# Altium PCB top_level.PcbDoc
Units mil, origin at the board's own origin, x right, y up, seen from the top; angles counter-clockwise.
Board outline 3400 x 1450 mil, 4 copper layers (Top Layer, Layer 1, Layer 2, Bottom Layer), stack 61.855 mil thick; 73 components, 69 nets, 309 pads, 97 vias.
Unrouted connection lines stored in the file: 1.
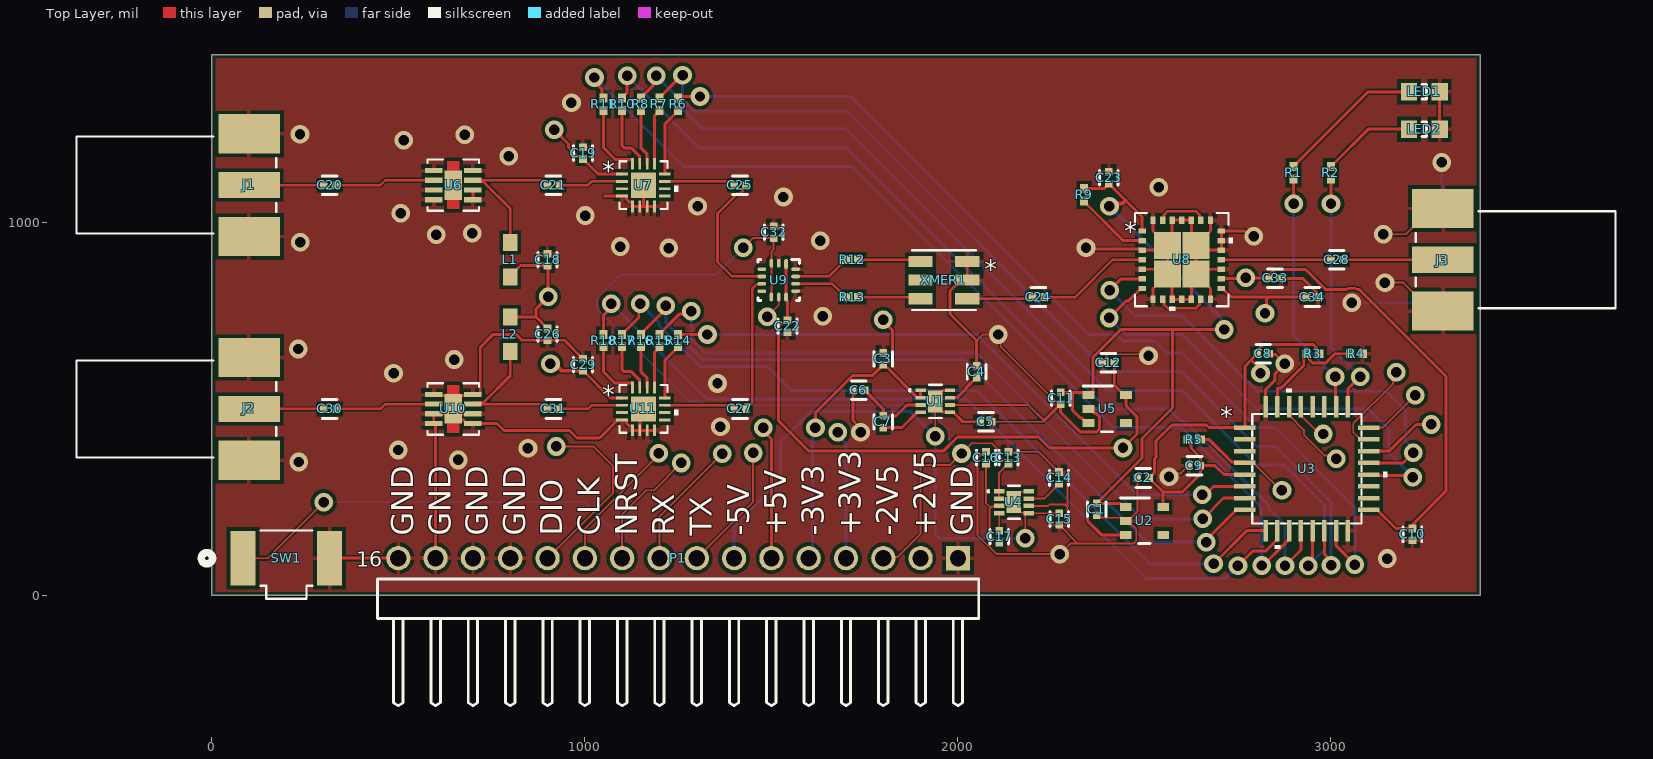
[diagram p0: Top Layer view]
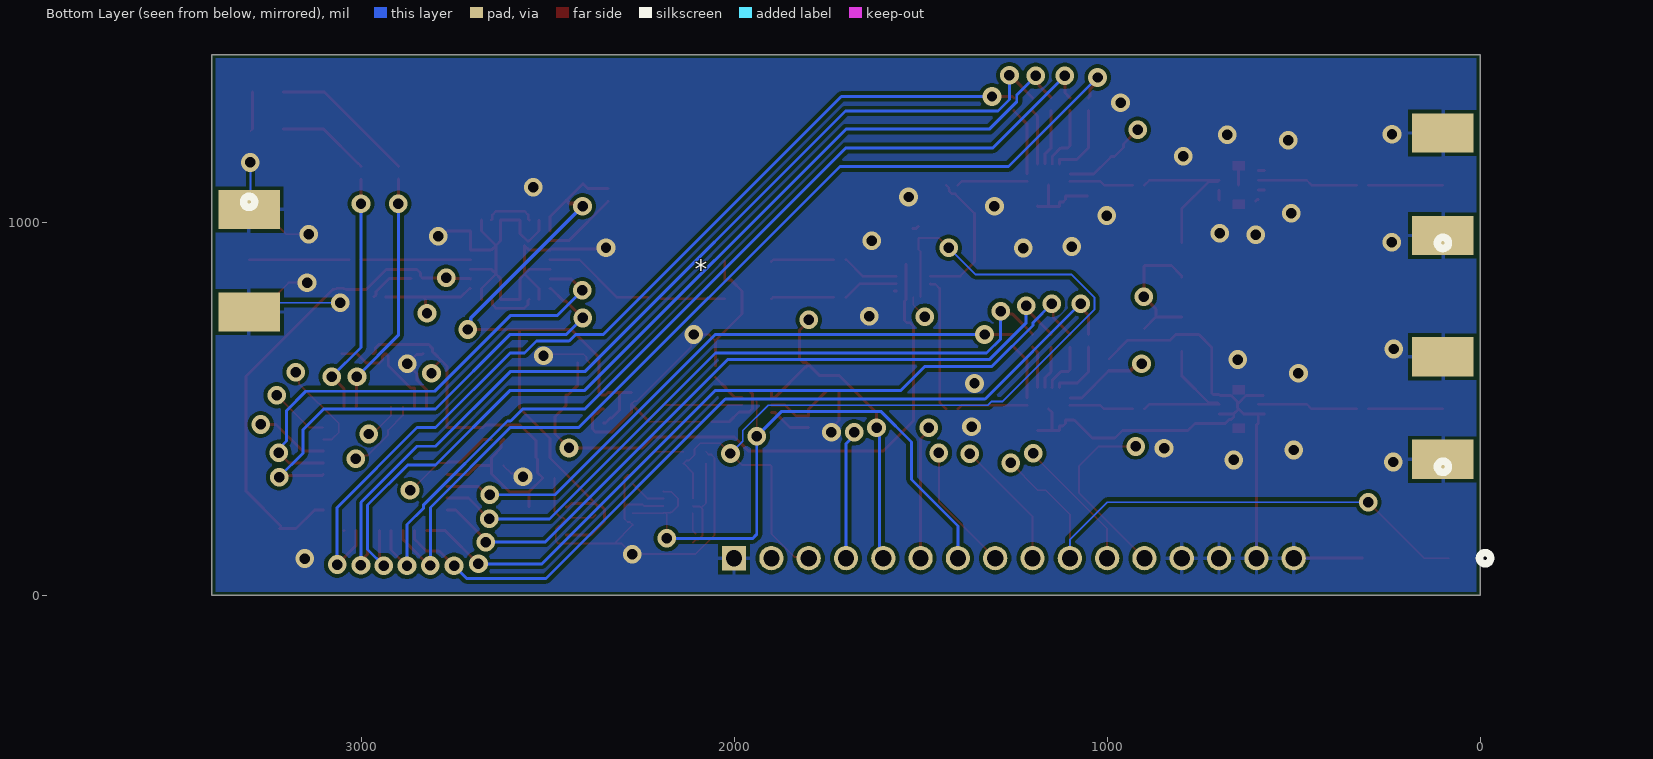
[diagram p1: Bottom Layer view, seen from below]
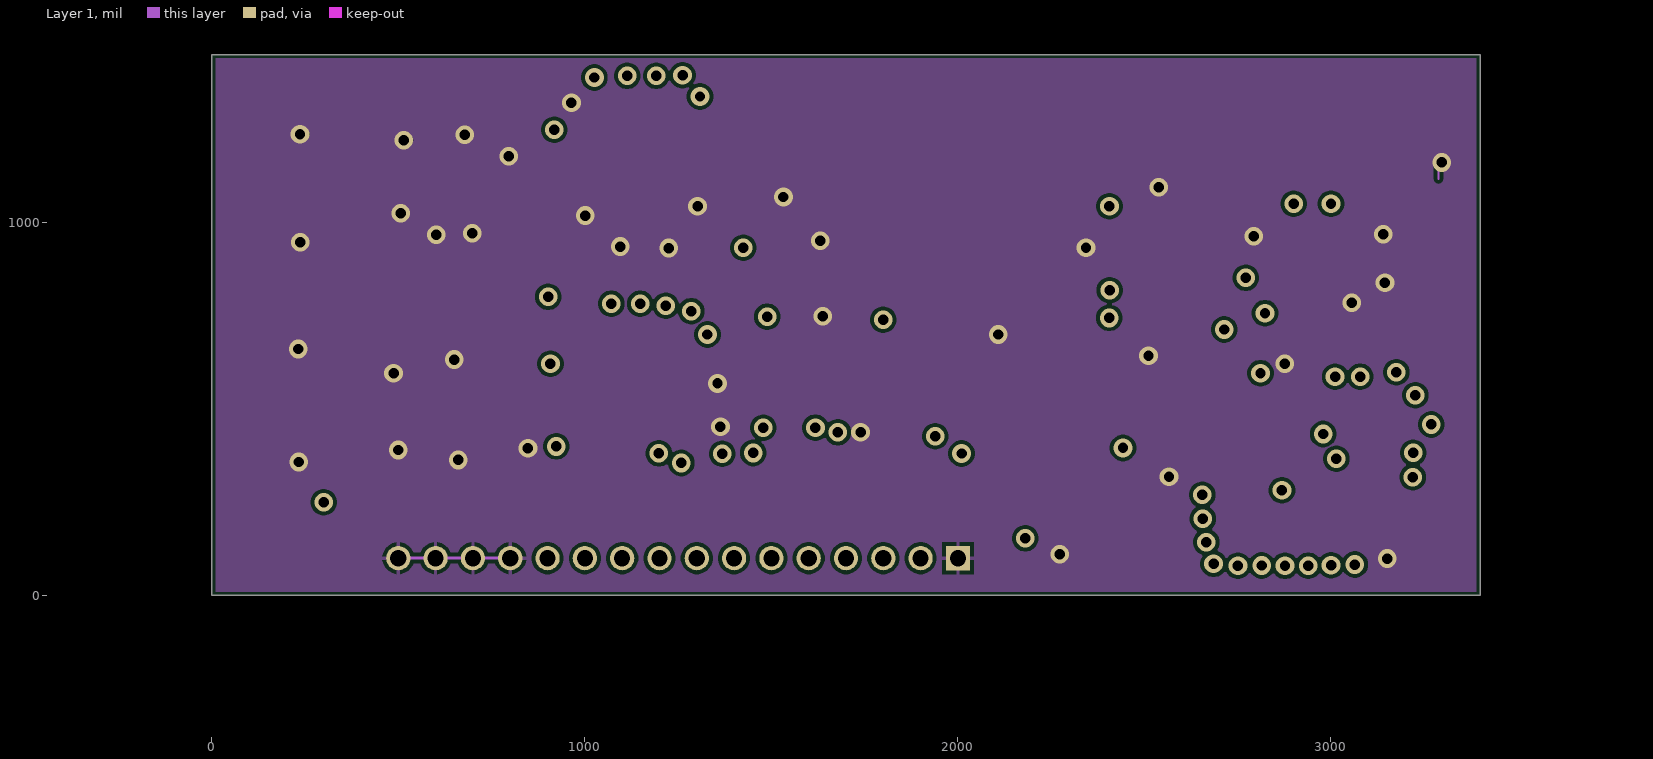
[diagram p2: Layer 1]
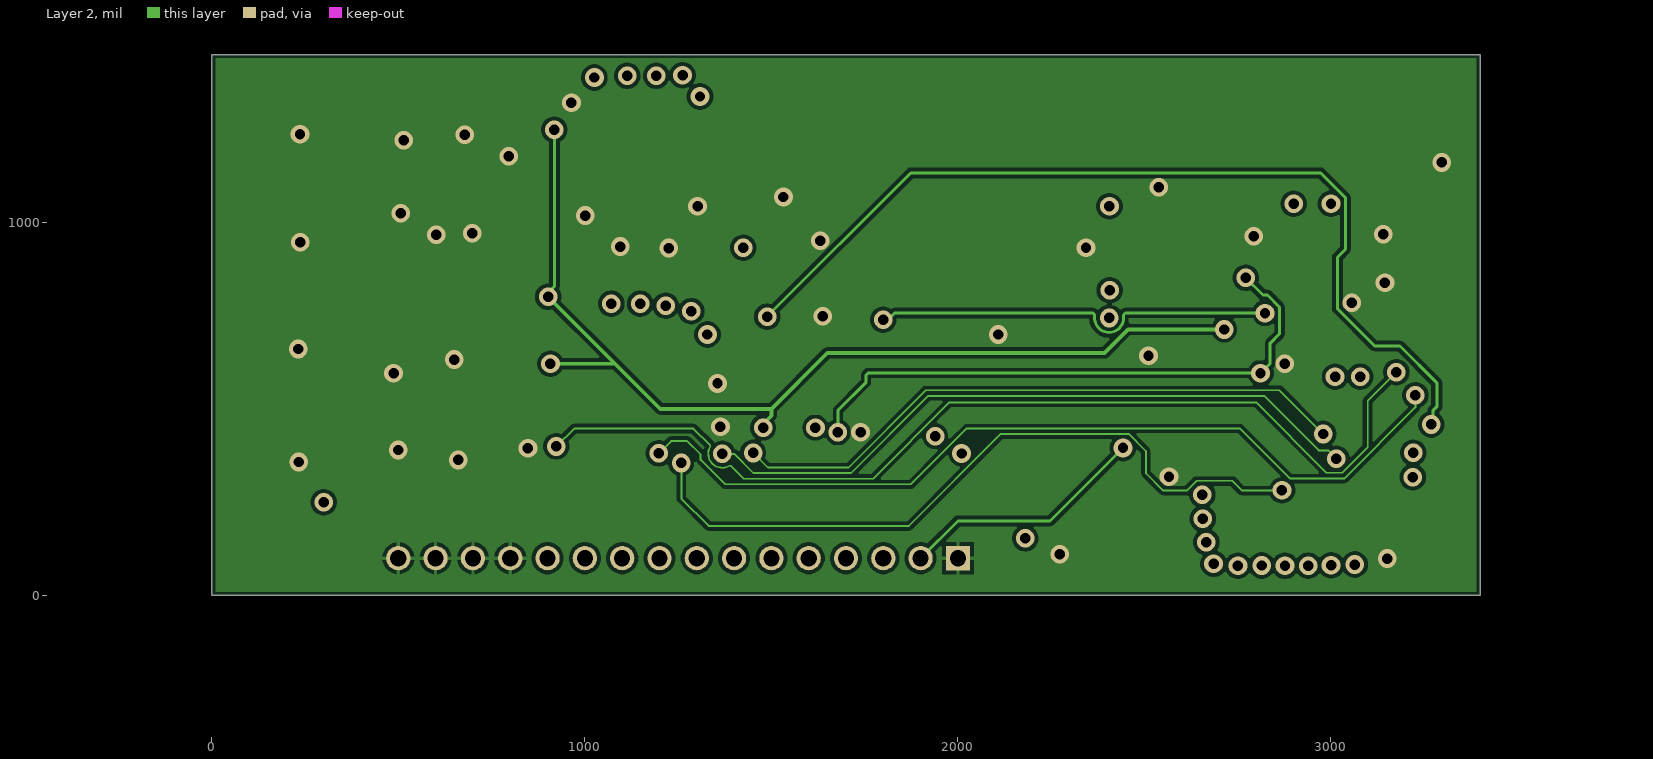
[diagram p3: Layer 2]
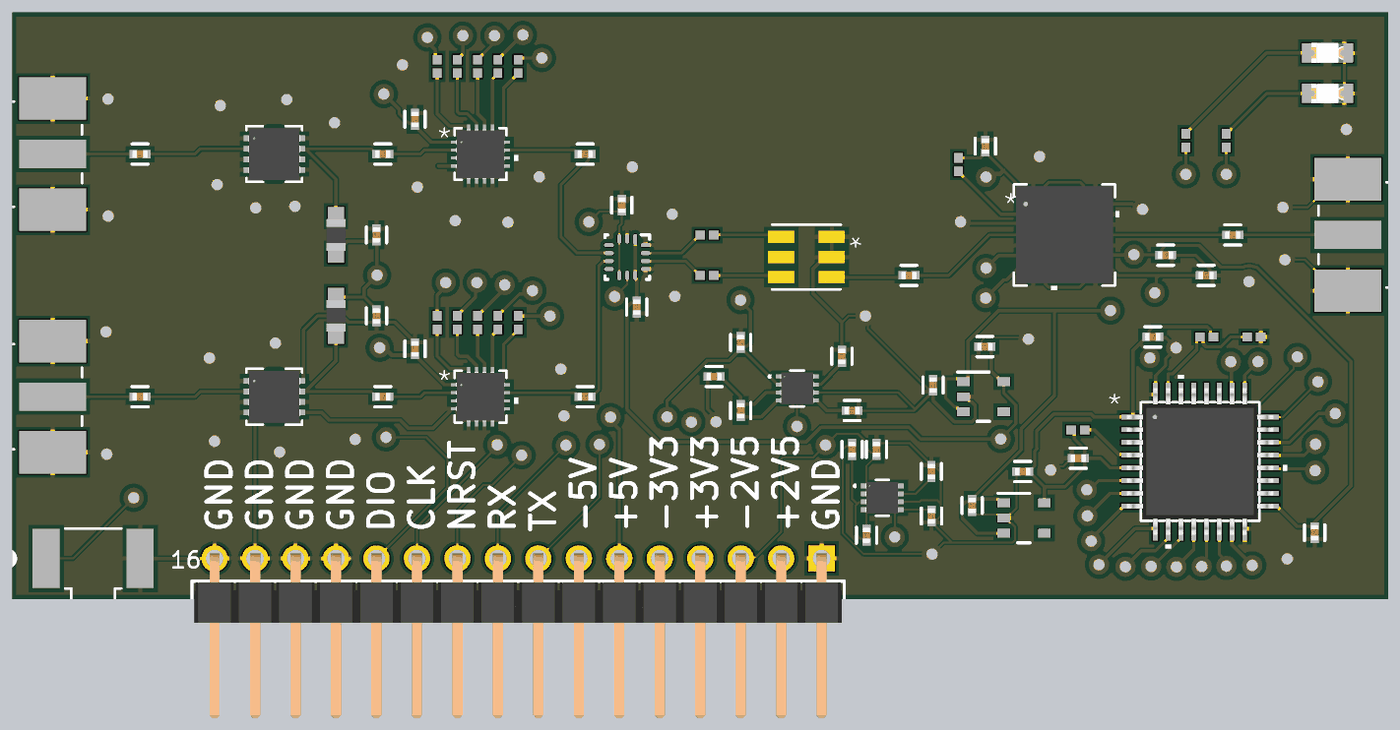
[diagram p4: 3D render of the assembled board from above, using the file's embedded part models]

## Layer stack, top to bottom
Top Solder: solder mask 0.4, Solder Resist, Dk 3.5
Top Layer: signal copper 1.4
Dielectric 2: prepreg 4, Core-011, Dk 4.4
Layer 1: signal copper 1.378
Dielectric 1: prepreg 48.2992, Core-011, Dk 4.4
Layer 2: signal copper 1.378
Dielectric 3: prepreg 4, Core-011, Dk 4.4
Bottom Layer: signal copper 1.4
Bottom Solder: solder mask 0.4, Solder Resist, Dk 3.5

## Board outline
0,0 3400,0 3400,1450 0,1450

## Design rules (kind name [scope] priority, off if disabled: settings)
BoardOutlineClearance [All] p1: gap=9.84 ignorepadtopadclearanceinfootprint=FALSE
Clearance Clearance_4 [InNamedPolygon('GND_poly_top')] p1: gap=10 ignorepadtopadclearanceinfootprint=FALSE except(0: Arc-Hole Track-Hole SMDPad-Hole THPad-Hole Via-Hole Fill-Hole Poly-Hole Region-Hole Text-Hole; 4: Arc-Fill Arc-Poly Arc-Region Track-Fill Track-Poly Track-Region)
Clearance Clearance_3 [InNet('NetC9_1')] p2 off: gap=15.75 ignorepadtopadclearanceinfootprint=TRUE
Clearance Clearance_2 [InNet('VIN')] p3 off: gap=31.5 ignorepadtopadclearanceinfootprint=TRUE
Clearance Clearance_1 [All] p4: gap=10 ignorepadtopadclearanceinfootprint=TRUE
Clearance [All] p5 off: gap=7.87 ignorepadtopadclearanceinfootprint=TRUE
ComponentClearance [All] p1 off: gap=10 collisioncheckmode=3 verticalgap=10 showdistances=FALSE
DiffPairsRouting [InDifferentialPair('DiffPair')] p1: maxlimit=10 minlimit=3.5 mostfreqgap=7.87 toplayer_minwidth=3.5 toplayer_maxwidth=15 toplayer_prefwidth=5.91 midlayer1_minwidth=3.5 midlayer1_maxwidth=15 midlayer1_prefwidth=5.91 midlayer2_minwidth=3.5 midlayer2_maxwidth=15 midlayer2_prefwidth=5.91 bottomlayer_minwidth=3.5 bottomlayer_maxwidth=15 bottomlayer_prefwidth=5.91 maxuncoupledlength=500
HoleSize [All] p1: absolutevalues=TRUE maxlimit=236.22 minlimit=1 maxpercent=80.000 minpercent=20.000
MatchedLengths usb [All] p1 off: tolerance=39.37 checknetsindiffpair=FALSE checkdiffpairvsdiffpair=TRUE checkxsignals=TRUE checkothers=TRUE
MinimumSolderMaskSliver [All] p1 off: minsoldermaskwidth=10
PlaneClearance [All] p1: clearance=10
PolygonConnect VIN [InNet('VIN')] p1: connectstyle=Direct reliefconductorwidth=10 reliefentries=4 polygonreliefangle="90 Angle" airgapwidth=10
PolygonConnect Connectors [HasFootprint('B06B-JWPF-SK-R')] p2: connectstyle=Direct reliefconductorwidth=10 reliefentries=4 polygonreliefangle="90 Angle" airgapwidth=10
PolygonConnect Connectors_1 [HasFootprint('B08B-JWPF-SK-R')] p3: connectstyle=Direct reliefconductorwidth=10 reliefentries=4 polygonreliefangle="90 Angle" airgapwidth=10
PolygonConnect Default [All] p4 off: connectstyle=Relief reliefconductorwidth=10 reliefentries=4 polygonreliefangle="90 Angle" airgapwidth=10
PolygonConnect vbus [InNet('NetQ1_1')] p5: connectstyle=Direct reliefconductorwidth=10 reliefentries=4 polygonreliefangle="90 Angle" airgapwidth=10
PolygonConnect vbus_1 [InNet('NetC9_1')] p6: connectstyle=Direct reliefconductorwidth=10 reliefentries=4 polygonreliefangle="90 Angle" airgapwidth=10
PolygonConnect VIAS [IsVia] p7: connectstyle=Direct reliefconductorwidth=0 reliefentries=4 polygonreliefangle="90 Angle" airgapwidth=0
PolygonConnect PolygonConnect_1 [All] p8: connectstyle=Relief reliefconductorwidth=10 reliefentries=4 polygonreliefangle="90 Angle" airgapwidth=10
RoomDefinition top_level [InComponentClass('top_level')] p1: confinementstyle=ConfineIn formatcopy=TRUE lockcomponents=FALSE outline -800,-350 3950,-350 3950,1600 -800,1600
RoutingVias [All] p1: holewidth=11.81 width=19.68 viastyle="Through Hole" minholewidth=9.84 minwidth=17.72 maxholewidth=248.03 maxwidth=50
SilkToSilkClearance [All] p1 off: silktosilkclearance=10
SilkToSolderMaskClearance [IsPad] p1 off: minsilkscreentomaskgap=10 clearancetoexposedcopper=TRUE
SolderMaskExpansion SolderMaskExpansion_1 [IsVia] p1: expansion=4 istentingtop=TRUE
SolderMaskExpansion [All] p2: expansion=4 istentingtop=FALSE
Width [All] p1: maxlimit=39.37 minlimit=5 preferedwidth=7.87
23 further rules are at their usual default settings.

## Components (designator, comment, footprint, x,y, rotation, side; value= is the part's Value field where it differs from the comment)
C1 "1uF" FP-C0402-BB-MFG 2371.79,231.06 r270 top value="0.10 μF"
C2 "1uF" FP-C0402-BB-MFG 2496.79,314.96 r180 top value="0.10 μF"
C3 "4.7uF" FP-C0402-BB-MFG 1800,634.25 r90 top value="0.10 μF"
C4 "1uF" FP-C0402-BB-MFG 2050,600 r90 top value="0.10 μF"
C5 "4.7uF" FP-C0402-BB-MFG 2075.24,465.75 r0 top value="0.10 μF"
C6 "1uF" FP-C0402-BB-MFG 1734.25,550 r180 top value="0.10 μF"
C7 "10nF" FP-C0402-BB-MFG 1800,465.75 r270 top value="0.10 μF"
C8 "10nF" FP-C0402-BB-MFG 2818.3,647.99 r0 top value="0.10 μF"
C9 "10nF" FP-C0402-BB-MFG 2634.05,347.99 r180 top value="0.10 μF"
C10 "10nF" FP-C0402-BB-MFG 3218.3,163.74 r270 top value="0.10 μF"
C11 "1uF" FP-C0402-BB-MFG 2275.4,528.73 r270 top value="0.10 μF"
C12 "1uF" FP-C0402-BB-MFG 2403.33,623.75 r180 top value="0.10 μF"
C13 "4.7uF" FP-C0402-BB-MFG 2135.49,369.7 r90 top value="0.10 μF"
C14 "1uF" FP-C0402-BB-MFG 2271.05,315.1 r90 top value="0.10 μF"
C15 "4.7uF" FP-C0402-BB-MFG 2271.33,205.01 r270 top value="0.10 μF"
C16 "1uF" FP-C0402-BB-MFG 2075.24,369.62 r90 top value="0.10 μF"
C17 "10nF" FP-C0402-BB-MFG 2110.96,157.4 r90 top value="0.10 μF"
C18 "C0402C104K8PACTU" FP-C0402-BB-MFG 900,900 r270 top value="0.10 μF"
C19 "C0402C104K8PACTU" FP-C0402-BB-MFG 995.15,1185.92 r90 top value="0.10 μF"
C20 "C0402C104K8PACTU" FP-C0402-BB-MFG 315.75,1100 r0 top value="0.10 μF"
C21 "C0402C104K8PACTU" FP-C0402-BB-MFG 915.75,1100 r0 top value="0.10 μF"
C22 "C0402C104K8PACTU" FP-C0402-BB-MFG 1543.08,721.7 r270 top value="0.10 μF"
C23 "C0402C104K8PACTU" FP-C0402-BB-MFG 2404.65,1119.65 r90 top value="0.10 μF"
C24 "C0402C104K8PACTU" FP-C0402-BB-MFG 2215.75,800 r0 top value="0.10 μF"
C25 "C0402C104K8PACTU" FP-C0402-BB-MFG 1415.75,1100 r0 top value="0.10 μF"
C26 "C0402C104K8PACTU" FP-C0402-BB-MFG 900,700 r90 top value="0.10 μF"
C27 "C0402C104K8PACTU" FP-C0402-BB-MFG 1415.75,500 r0 top value="0.10 μF"
C28 "C0402C104K8PACTU" FP-C0402-BB-MFG 3015.75,900 r0 top value="0.10 μF"
C29 "C0402C104K8PACTU" FP-C0402-BB-MFG 995.15,618.49 r90 top value="0.10 μF"
C30 "C0402C104K8PACTU" FP-C0402-BB-MFG 315.75,500 r0 top value="0.10 μF"
C31 "C0402C104K8PACTU" FP-C0402-BB-MFG 915.75,500 r0 top value="0.10 μF"
C32 "C0402C104K8PACTU" FP-C0402-BB-MFG 1506.14,973.71 r90 top value="0.10 μF"
C33 "C0402C104K8PACTU" FP-C0402-BB-MFG 2850,850 r180 top value="0.10 μF"
C34 "C0402C104K8PACTU" FP-C0402-BB-MFG 2950,800 r180 top value="0.10 μF"
J1 "142-0711-821" CONN_142-0711-821_CIN -95,1100 r90 top
J2 "142-0711-821" CONN_142-0711-821_CIN -95,500 r90 top
J3 "142-0711-821" CONN_142-0711-821_CIN 3495,900 r270 top
L1 "7447905" SMD-0805 800,900 r270 top
L2 "7447905" SMD-0805 800,700 r90 top
LED1 "150080SS75000" 0805_A 3250,1350 r180 top
LED2 "150080SS75000" 0805_A 3250,1250 r180 top
P1 "61301611021" 61301611021 1250,-9.06 r0 top
R1 "100" RESC1005X40X25NL05T10 2900,1133.27 r270 top
R2 "100" RESC1005X40X25NL05T10 3000,1133.27 r270 top
R3 "10k" RESC1005X40X25NL05T10 2951.57,647.99 r180 top
R4 "10k" RESC1005X40X25NL05T10 3068.3,647.99 r0 top
R5 "10k" RESC1005X40X25NL05T10 2633.41,417.58 r0 top
R6 "RC0402JR-070RL" RESC1005X40X25NL05T10 1250,1316.73 r90 top
R7 "RC0402JR-070RL" RESC1005X40X25NL05T10 1200,1316.73 r90 top
R8 "RC0402JR-070RL" RESC1005X40X25NL05T10 1150,1316.73 r90 top
R9 "560" RESC1005X40X25NL05T10 2338.15,1073.82 r270 top
R10 "RC0402JR-070RL" RESC1005X40X25NL05T10 1100,1316.73 r90 top
R11 "RC0402JR-070RL" RESC1005X40X25NL05T10 1050,1316.73 r90 top
R12 "40" RESC1005X40X25NL05T10 1716.73,900 r0 top
R13 "40" RESC1005X40X25NL05T10 1716.73,800 r0 top
R14 "RC0402JR-070RL" RESC1005X40X25NL05T10 1250,683.27 r90 top
R15 "RC0402JR-070RL" RESC1005X40X25NL05T10 1200,683.27 r90 top
R16 "RC0402JR-070RL" RESC1005X40X25NL05T10 1150,683.27 r90 top
R17 "RC0402JR-070RL" RESC1005X40X25NL05T10 1100,683.27 r90 top
R18 "RC0402JR-070RL" RESC1005X40X25NL05T10 1050,683.27 r90 top
SW1 "KSS221GLFS" SW_KSS221GLFS_CNK 200,100 r0 top
U1 "ADP7185ACPZN3.3-R7" CP_8_27_ADI 1939.46,520.47 r0 top
U2 "LP5907MFX-3.3/NOPB" DBV0005A_L 2500,200 r0 top
U3 "STM32L051K8T6" LQFP32_7X7X1P4 2935.15,339.7 r0 top
U4 "ADP7183ACPZN" CP-8-27_ADI 2150,250 r0 top
U5 "LP5907MFX-2.5/NOPB" DBV0005A_L 2400,500 r0 top
U6 "CMA-5043+" DL1721_MNC 647.5,1100 r0 top
U7 "HMC539ALP3E" HCP_16_1_ADI 1157.18,1100 r0 top
U8 "ADL8111ACCZN" IC28_ADL8111ACCZN_ADI 2600,900 r0 top
U9 "LMH3401IRMST" RMS0014A 1519.68,845.28 r270 top
U10 "CMA-5043+" DL1721_MNC 647.5,500 r0 top
U11 "HMC539ALP3E" HCP_16_1_ADI 1157.18,500 r0 top
XMER1 "TCM2-63WX+" DB1627_MNC 1962.5,845.28 r180 top

## Footprints (in the part's own frame and the unit in brackets; to place one, negate y for a bottom-side part, rotate by r counter-clockwise, add the part's x,y. Pads: shape width x height; smd on the part's side, far side on the other; paste and mask are expansions set on the pad)
0805_A [mm] "Chip LED, 2-Leads, Body 2.0x1.3mm, IPC Medium Density"
  rect 1.1x1.2 smd: 1(-1.05,0) 2(1.05,0)
  silkscreen extent -0.15,-0.5 0.15,0.5, body extent -1,-0.62 1,0.63, height 0.68
61301611021 [mm] "Pin Header, pitch 2.54 mm, THT, Angled, single row, 16p"
  rect 1.65x1.65 hole 1.1: 1(19.05,2.77)
  round 1.65 hole 1.1: 2(16.51,2.77) 3(13.97,2.77) 4(11.43,2.77) 5(8.89,2.77) 6(6.35,2.77) 7(3.81,2.77) 8(1.27,2.77) 9(-1.27,2.77) 10(-3.81,2.77) 11(-6.35,2.77) 12(-8.89,2.77) 13(-11.43,2.77) 14(-13.97,2.77) 15(-16.51,2.77) 16(-19.05,2.77)
  silkscreen extent -20.47,-7.27 20.47,1.35, body extent -20.32,-7.27 20.32,3.09, height 2.58
CONN_142-0711-821_CIN [mil]
  rect 70x165 smd paste+0 mask+0: 1(0,-195)
  rect 105x165 smd: 2(-137.5,-195) 2(137.5,-195)
  rect 105x165 smd far side: 2(-135,-195) 2(140,-195)
  silkscreen extent -130,-268 130,268, body extent 0,0 10,10, height 10
CP-8-27_ADI [mm]
  rect 0.705x0.3 smd paste+0 mask+0: 1(-1.002,0.75) 2(-1.002,0.25) 3(-1.002,-0.25) 4(-1.002,-0.75) 5(1.002,-0.75) 6(1.002,-0.25) 7(1.002,0.25) 8(1.002,0.75)
  rect 1x1.5 smd paste-0.737 mask+0: 9(0,0)
  silkscreen extent -1.78,-1.13 0.41,1.13, body extent -1.05,-1 1.05,1, height 0.58
CP_8_27_ADI [mm]
  rect 0.705x0.249 smd paste+0 mask+0: 1(-1.002,0.75) 2(-1.002,0.25) 3(-1.002,-0.25) 4(-1.002,-0.75) 5(1.002,-0.75) 6(1.002,-0.25) 7(1.002,0.25) 8(1.002,0.75)
  rect 1x1.5 smd paste+0 mask+0: 9(0,0)
  silkscreen extent -1.78,-1.13 0.43,1.13, body extent -1.05,-1 1.05,1, height 0.55
DB1627_MNC [mil]
  rect 65x30 smd paste-15 mask+0: 1(-62.5,-50) 2(-62.5,0) 3(-62.5,50) 4(62.5,50) 5(62.5,0) 6(62.5,-50)
  silkscreen extent -85,-80 85,80, body extent 0,0 10,10, height 10
DBV0005A_L [mm]
  rect 0.8x0.55 smd paste+0 mask+0.051: 1(-1.275,0.95) 2(-1.275,0) 3(-1.275,-0.95) 4(1.275,-0.95) 5(1.275,0.95)
  silkscreen extent -1.63,-1.55 0.38,1.55, body extent 0,0 0.25,0.25, height 0.25
DL1721_MNC [mil]
  rect 47x14 smd paste+0 mask+0: 1(-52.5,39) 2(-52.5,13) 3(-52.5,-13) 4(-52.5,-39) 5(52.5,-39) 6(52.5,-13) 7(52.5,13) 8(52.5,39)
  rect 47x79 smd paste+0 mask+0: 9(0,0)
  Top Layer region: 0,-39.5 16,-39.5 16,-64 0,-64
  Top Layer region: 0,-39.5 -16,-39.5 -16,-64 0,-64
  Top Layer region: 0,39.5 16,39.5 16,64 0,64
  Top Layer region: 0,39.5 -16,39.5 -16,64 0,64
  silkscreen extent -69,-69 69,69, body extent -64,-64 64,64, height 45
FP-C0402-BB-MFG [mm]
  rect 0.52x0.52 smd paste+0 mask+0: 1(-0.4,0) 2(0.4,0)
  silkscreen extent -0.5,-0.64 0.5,0.64, body extent -0.8,-0.4 0.8,0.4, height 0.25
HCP_16_1_ADI [mm]
  rect 0.805x0.189 smd paste+0 mask+0: 1(-1.452,0.75) 2(-1.452,0.25) 3(-1.452,-0.25) 4(-1.452,-0.75) 9(1.452,-0.75) 10(1.452,-0.25) 11(1.452,0.25) 12(1.452,0.75)
  rect 0.189x0.805 smd paste+0 mask+0: 5(-0.75,-1.452) 6(-0.25,-1.452) 7(0.25,-1.452) 8(0.75,-1.452) 13(0.75,1.452) 14(0.25,1.452) 15(-0.25,1.452) 16(-0.75,1.452)
  rect 1.725x1.725 smd paste+0 mask+0: 17(0,0)
  silkscreen extent -1.63,-1.63 2.36,1.63, body extent -1.55,-1.55 1.55,1.55, height 1
IC28_ADL8111ACCZN_ADI [mil]
  rect 20x14 smd paste+0 mask+0: 1(-106.14,76.77) 2(-106.14,51.18) 3(-106.14,25.59) 4(-106.14,0) 5(-106.14,-25.59) 6(-106.14,-51.18) 7(-106.14,-76.77) 15(106.14,-76.77) 16(106.14,-51.18) 17(106.14,-25.59) 18(106.14,0) 19(106.14,25.59) 20(106.14,51.18) 21(106.14,76.77)
  rect 14x20 smd paste+0 mask+0: 8(-76.77,-106.14) 9(-51.18,-106.14) 10(-25.59,-106.14) 11(0,-106.14) 12(25.59,-106.14) 13(51.18,-106.14) 14(76.77,-106.14) 22(76.77,106.14) 23(51.18,106.14) 24(25.59,106.14) 25(0,106.14) 26(-25.59,106.14) 27(-51.18,106.14) 28(-76.77,106.14)
  rect 72x72 smd paste+0 mask+0: 29(-38.39,-38.39) 30(-38.39,38.39) 31(38.39,-38.39) 32(38.39,38.39)
  silkscreen extent -125,-136 136,125, body extent -120,-120 120,120, height 56
LQFP32_7X7X1P4 [mil]
  rect 58x12 smd: 1(-166,110.24) 2(-166,78.74) 3(-166,47.24) 4(-166,15.75) 5(-166,-15.75) 6(-166,-47.24) 7(-166,-78.74) 8(-166,-110.24) 17(166,-110.24) 18(166,-78.74) 19(166,-47.24) 20(166,-15.75) 21(166,15.75) 22(166,47.24) 23(166,78.74) 24(166,110.24)
  rect 12x58 smd: 9(-110.24,-166) 10(-78.74,-166) 11(-47.24,-166) 12(-15.75,-166) 13(15.75,-166) 14(47.24,-166) 15(78.74,-166) 16(110.24,-166) 25(110.24,166) 26(78.74,166) 27(47.24,166) 28(15.75,166) 29(-15.75,166) 30(-47.24,166) 31(-78.74,166) 32(-110.24,166)
  silkscreen extent -146,-215 215,215, body extent -181,-181 181,181, height 63
RESC1005X40X25NL05T10 [mm] "Chip Resistor, 2-Leads, Body 1.00x0.50mm, IPC Medium Density"
  rect 0.6x0.55 smd: 1(-0.425,0) 2(0.425,0)
  body extent -0.53,-0.27 0.53,0.28, height 0.4
RMS0014A [mm]
  oval 0.7x0.25 smd paste+0 mask+0.051: 1(-1.1,0.5)
  oval 0.6x0.25 smd paste+0 mask+0.051: 2(-1.15,0) 3(-1.15,-0.5) 8(1.15,-0.5) 9(1.15,0) 10(1.15,0.5)
  oval 0.25x0.6 smd paste+0 mask+0.051: 4(-0.75,-1.15) 5(-0.25,-1.15) 6(0.25,-1.15) 7(0.75,-1.15) 11(0.75,1.15) 12(0.25,1.15) 13(-0.25,1.15) 14(-0.75,1.15)
  silkscreen extent -1.4,-1.4 1.4,1.4, body extent 0,0 0.25,0.25, height 0.25
SMD-0805 [mm] "Chip Inductor, 2-Leads, Body 2.0x1.2mm"
  rect 1.15x1 smd: 1(-1.175,0) 2(1.175,0)
  body extent -1,-0.6 1,0.6, height 0.89
SW_KSS221GLFS_CNK [mil]
  rect 67x146 smd paste+0 mask+0: 1(-116.14,0) 2(116.14,0)
  silkscreen extent -228,-109 70,74, body extent 0,0 10,10, height 10

## Part data
C1 C2 C3 C4 C5 C6 C7 C8 C9 C10 C11 C12 C13 C14 C15 C16 C17: library part CMP-2008-02046-2, "CAP CER 0.1UF 10V X5R 0402", Capacitance="0.10 μF", Manufacturer=Kemet, Manufacturer Part Number=C0402C104K8PACTU, Package=C0402-BB, Temperature="-55°C to +125°C", Temperature Characteristic=X5R, Temperature Coefficient=15%, Temperature Range High=+125°C, Temperature Range Low=-55°C, Tolerance=0.1, Voltage Rating="10 V", Automotive=No, Category=Cap, ComponentLink2Description=Datasheet, ComponentLink2URL=https://content.kemet.com/datasheets/KEM_C1002_X7R_SMD.pdf, Device Class L1="Passive Components", Device Class L2=Capacitors, Device Class L3="Ceramic Capacitors", Digikey Description="CAP CER 0.1UF 10V X5R 0402", Height=0.55mm, Ipc Land Pattern Name=CAPC10050X50, Lead Free=Yes, Material=Ceramic, Mouser Description="Capacitor 100 nF 10 VDC 0402", Octopart=https://octopart.com/c0402c104k8pactu-kemet-140039, RoHS=TRUE
C18 C19 C20 C21 C22 C23 C24 C25 C26 C27 C28 C29 C30 C31 C32 C33 C34: library part CMP-2008-02046-2, "CAP CER 0.1UF 10V X5R 0402", Capacitance="0.10 μF", Manufacturer=Kemet, Package=C0402-BB, Temperature="-55°C to +125°C", Temperature Characteristic=X5R, Temperature Coefficient=15%, Temperature Range High=+125°C, Temperature Range Low=-55°C, Tolerance=0.1, Voltage Rating="10 V", Automotive=No, Category=Cap, ComponentLink2Description=Datasheet, ComponentLink2URL=https://content.kemet.com/datasheets/KEM_C1002_X7R_SMD.pdf, Device Class L1="Passive Components", Device Class L2=Capacitors, Device Class L3="Ceramic Capacitors", Digikey Description="CAP CER 0.1UF 10V X5R 0402", Height=0.55mm, Ipc Land Pattern Name=CAPC10050X50, Lead Free=Yes, Manufacturer Part Number=C0402C104K8PACTU, Material=Ceramic, Mouser Description="Capacitor 100 nF 10 VDC 0402", Octopart=https://octopart.com/c0402c104k8pactu-kemet-140039, RoHS=TRUE
J1 J2 J3: "No Description Available", Mfr_Name="Cinch Connectivity Solutions", Copyright="Copyright (C) 2022 Ultra Librarian. All rights reserved.", Manufacturer_Part_Number=142-0711-821, RefDes=RefDes, Type=DEV
L1 L2: library part CMP-0221-00012-1, "SMD-Multilayer Inductor WE-MI, L = 1.00 µH", Inductance="1.00 ÂµH", ComponentLink1Description="Manufacturer Link", ComponentLink1URL=http://www.we-online.com, ComponentLink2Description=Datasheet, ComponentLink2URL=http://www.we-online.de/katalog/media/pdf/7447905.pdf, DatasheetVersion="ver 4, Oct-2004", PackageDescription="Chip Inductor, 2-Leads, Body 2.0 x 1.2 mm", PackageReference=SMD-0805, PackageVersion=2005
LED1 LED2: library part CMP-1426-00010-1, "SMD mono-color Chip LED, WL-SMCW, Super Red", Color="Super Red", Manufacturer="Wuerth Elektronik", ComponentLink1Description="Manufacturer URL", ComponentLink1URL=http://www.we-online.com, ComponentLink2Description=Datasheet, ComponentLink2URL=http://katalog.we-online.com/led/datasheet/150080SS75000.pdf, PackageReference=0805_A, PartNumber=150080SS75000
P1: library part CMP-1502-01094-1, "THT Angled Pin Header WR-PHD, Pitch 2.54 mm, Single Row, 16 pins", Contact Resistance=20mOhm, Manufacturer="Wurth Elektronik", Operating Temperature=-40to105degC, Rated Current=3A, Withstanding Voltage=500VAC, Working Voltage=250VAC, Datasheet URL=https://katalog.we-online.de/em/datasheet/6130xx11021.pdf, Gender=Male, Manufacturer URL=http://www.we-online.de, Mounting Technology=THT, Orientation=Angled, Package Reference=61301611021, Packaging=Bag, Part Number=61301611021, Pin Number=16, Pitch=2.54mm, Publisher=WurthElektronik, Row Number=Single
R1 R2 R3 R4 R5 R9 R12 R13: library part CMP-1011-00001-2, Manufacturer="Yageo / Phycomp", Part Number=RC0402JR-070RL
R6 R7 R8 R10 R11 R14 R15 R16 R17 R18: library part CMP-1011-00001-2, Manufacturer="Yageo / Phycomp", Part Number=RC0402JR-070RL
SW1: "No Description Available", Mfr_Name=C&K, Copyright="Copyright (C) 2022 Ultra Librarian. All rights reserved.", Manufacturer_Part_Number=KSS221GLFS, RefDes=RefDes, Type=DEV
U1 U4 U7 U8 U11: "No Description Available", Mfr_Name="Analog Devices Inc", Copyright="Copyright (C) 2022 Ultra Librarian. All rights reserved.", RefDes=RefDes, Type=DEV
  U1: Manufacturer_Part_Number=ADP7185ACPZN3.3-R7
  U4: Manufacturer_Part_Number=ADP7183ACPZN
  U7 U11: Manufacturer_Part_Number=HMC539ALP3E
  U8: Manufacturer_Part_Number=ADL8111ACCZN
U2 U5 U9: "No Description Available", Mfr_Name="Texas Instruments", Copyright="Copyright (C) 2022 Ultra Librarian. All rights reserved.", RefDes=RefDes, Type=DEV
  U2: Manufacturer_Part_Number=LP5907MFX-3.3/NOPB
  U5: Manufacturer_Part_Number=LP5907MFX-2.5/NOPB
  U9: Manufacturer_Part_Number=LMH3401IRMST
U3: "No Description Available", Mfr_Name=STMicroelectronics, Copyright="Copyright (C) 2022 Ultra Librarian. All rights reserved.", Manufacturer_Part_Number=STM32L051K8T6, RefDes=RefDes, Type=DEV
U6 U10 XMER1: "No Description Available", Mfr_Name="Mini Circuits", Copyright="Copyright (C) 2022 Ultra Librarian. All rights reserved.", RefDes=RefDes, Type=DEV
  U6 U10: Manufacturer_Part_Number=CMA-5043+
  XMER1: Manufacturer_Part_Number=TCM2-63WX+

## Via types
v1: diameter 50/50/50/50 (per signal layer), hole 28, Top Layer to Bottom Layer, tented both sides, 97 vias

## Nets (pads, with @x,y where several pads share a name; then routed paths per layer and width w, separated by ;. In a path a pad name is that pad's centre, name@x,y a point inside that pad or via, vN(x,y) a via of type N, cw(c..) or ccw(c..) an arc to the next point about the centre after c; other vN are vias at no path point)
2V5: C12.1 C22.1 P1.2 U5.5 U9.1 U9.10 | length 2357.9
  Top Layer w7.87: U9.1 1539.21,888.43 1539.21,792.73 1543.08,788.87 C22.1 1536.78,731.14 1528.09,731.14 1518.91,721.96 1518.91,468.59 1599.7,387.8 1961.89,387.8 1998.63,424.54 2216.25,424.54 2245.35,395.44 v1(2442.55,395.44) 2479.88,432.77 2479.88,479.2 2450.2,508.88 U5.5 2445.28,537.4 2419.08,563.6 C12.1
  Layer 2 w7.87: P1.2 2000,200 2247.11,200 v1(2442.55,395.44)
3V3: C2.1 C8.1 C9.1 C10.1 C33.2 P1.4 R3.1 R5.1 U2.5 U3.1 U3.5 U3.17 U8.16 | length 4497.4
  Top Layer w7.87: U2.5 2550.2,277.29 ; R5.1 2617.51,417.58 2624.4,410.69 2624.4,395.44 2649.8,370.03 C9.1 ; U8.16 2707.38,850.05 2770.38,850.05 v1(2771.61,851.29) 2772.26,850.65 2833.61,850.65 C33.2 2840.55,856.3 2840.55,864.99 2849.74,874.17 2932.05,874.17 2985.98,820.24 3039.98,820.24 cw(c3056.07,784.78) 3072.16,820.24 3075.68,820.24 3077.98,817.93 3307.86,588.05 3307.86,279.33 C10.1@3215.03,186.51 ; U3.5 2713.14,323.95 2689.11,347.99 C9.1 ; v1(2811.07,596) 2811.07,606.07 2785.85,631.28 ; R3.1 2967.48,647.99 2960.59,654.88 2960.59,664.59 2952.42,672.75 2818.63,672.75 2808.86,662.97 2808.86,654.29 C8.1 2785.85,631.28 ; U3.17 3124.15,229.47 3174.13,179.48 C10.1 ; 2550.2,277.29 2601.15,277.29 2649.8,325.94 C9.1 ; 2550.2,277.29 C2.1 2526.81,329.23 2526.81,366.1 2532.26,371.55 2531.41,372.4 2531.41,415.25 2573.51,457.35 2665.81,457.35 2673.22,449.94 U3.1 2769.15,614.58 2785.85,631.28
  Layer 2 w7.87: v1(1678.13,437.11) 1678.13,495.94 1754,571.81 1754,591.39 1758.61,596 v1(2811.07,596) 2811.07,596.28 2836.96,622.17 2836.96,676.25 2862.1,701.38 2862.1,772.91 2829.79,805.22 2817.68,805.22 v1(2771.61,851.29)
  Bottom Layer w7.87: v1(1678.13,437.11) 1678.13,428.8 1700,406.93 P1.4
5V: C1.1 C11.1 C18.2 C19.1 C23.1 C26.2 C29.1 L1.2 L2.2 P1.6 R9.1 U2.1 U2.3 U5.1 U5.3 U7.1 U8.1 U11.1 | length 6146.3
  Top Layer w7.87: L2.2 869.49,746.26 ; L1.2 800,856.69 827.56,884.25 C18.2 900.77,883.49 900.77,801.32 v1(901.53,800.56) 869.49,768.51 869.49,746.26 ; C26.2 869.49,746.26 ; v1(918.19,1248.42) 956.06,1210.55 956.06,1200.58 980.17,1176.48 988.85,1176.48 C19.1 1035.8,1129.53 U7.1 ; C29.1 1068.37,529.53 U11.1 ; v1(1478.41,449.63) 1478.41,440.75 1500,419.16 P1.6 ; C11.1 2306.6,544.48 ; R9.1 2391.31,1090.55 C23.1 2449.26,1059.3 2493.86,1014.7 U8.1 ; U5.3 2344.88,462.6 2332.24,475.24 2328.28,475.24 2306.6,496.92 2306.6,544.48 ; U2.3 2384.32,162.6 2347.62,199.31 2347.62,231.32 2356.8,240.51 2365.49,240.51 C1.1 ; U2.1 2444.88,237.4 2435.47,246.81 C1.1 ; v1(2713.67,713.06) 2575.19,713.06 ; 2306.6,544.48 2337.81,544.48 2344.88,537.4 U5.1 2354.72,537.4 2361.61,544.29 2361.61,637.96 2436.71,713.06 2575.19,713.06 ; C1.1 2493.33,368.35 2493.33,420.94 2575.19,502.81 2575.19,713.06
  Top Layer w10: v1(907.83,621.13) 918.65,621.13 937.04,602.75 C29.1 ; v1(2406.16,1043.3) 2413.81,1050.95 2440.91,1050.95 2449.26,1059.3
  Layer 2 w7.87: v1(901.53,800.56) 901.53,811.95 918.19,828.61 v1(918.19,1248.42)
  Layer 2 w10: v1(901.53,800.56) 1080.96,621.13 ; v1(907.83,621.13) 1080.96,621.13 ; v1(1478.41,449.63) 1478.41,460.46 1500,482.05 1500,500 ; v1(2713.67,713.06) 2456.23,713.06 2393.17,650 1650,650 1500,500 ; 1080.96,621.13 1202.09,500 1500,500
  Bottom Layer w10: v1(2406.16,1043.3) 2706.02,743.44 2706.02,720.72 v1(2713.67,713.06)
-2V5: C13.1 C32.1 P1.3 U4.1 U4.2 U9.3 U9.8 | length 2588.6
  Top Layer w5: v1(1424.74,932.13) 1450.58,957.96 C32.1 1506.14,927.56 1500,921.42 U9.3 U9.8 ; P1.3 1803.1,103.1 1837.05,103.1 1900,166.05 1900,347.07 1902.93,350 1979.16,350 v1(2009.7,380.54) 2037.26,408.11 2090.65,408.11 2105.87,392.88 2105.87,376.92 2121.1,361.69 2127.75,361.69 C13.1 2110.54,329.01 U4.1 U4.2
  Bottom Layer w5: v1(1424.74,932.13) 1353.31,860.69 1096.47,860.69 1033.64,797.86 1033.64,766.79 1279.97,520.47 1309.76,520.47 1320.16,510.07 1908.88,510.07 1976.68,442.27 1976.68,413.56 v1(2009.7,380.54)
-3V3: C3.1 C34.2 P1.5 U1.1 U1.2 U8.15 | length 2315.1
  Top Layer w7.87: v1(1618.07,449.94) 1618.07,489.75 1717.43,589.11 1770.6,589.11 C3.1 ; v1(1799.63,738.94) 1799.63,735.96 1824.17,711.42 1824.17,633.99 1814.99,624.8 1806.3,624.8 C3.1 ; U1.1 U1.2 1891.03,530.31 1809.14,612.2 1806.3,612.2 C3.1 ; U8.15 2709.14,823.23 2732.37,800 2833.31,800 ; v1(2823.16,756.79) 2826.91,760.53 2826.91,793.6 2833.31,800 ; C34.2 2833.31,800
  Layer 2 w7.87: v1(1799.63,738.94) 1807.69,747 1820.36,747 1830.15,756.79 2361.79,756.79 2364,754.81 cw(c2358.79,748.91) 2364.73,754.08 2366.41,752.17 2366.63,749.64 cw(c2358.79,748.91) 2366.62,748.12 ccw(c2405.34,744.02) 2444.06,748.14 cw(c2451.9,748.91) 2444.06,749.6 2444.28,752.17 2445.99,754.11 cw(c2451.9,748.91) 2446.65,754.78 2448.89,756.79 v1(2823.16,756.79)
  Bottom Layer w7.87: P1.5 1610.01,110.01 1610.01,441.87 v1(1618.07,449.94)
-5V: C5.1 C15.1 P1.7 U1.5 U1.8 U1.9 U4.5 U4.8 U4.9 | length 1904.6
  Top Layer w5: v1(1939.18,426.73) 1939.18,520.19 U1.9 ; v1(2180.57,153.08) 2180.57,217.07 U4.5@2185.25,221.75 ; U4.8 2188.18,278.25 2168.41,278.25 2150,259.84 U4.9 2150,240.16 2167.19,222.97 2169.19,222.97 2170.41,221.75 U4.5@2185.25,221.75 ; C15.1 2271.04,220.47 U4.5 2188.18,221.75 U4.5@2185.25,221.75
  Top Layer w7.87: U1.8 1978.09,549.16 1959.28,549.16 1951.12,540.99 1951.12,499.95 1959.28,491.79 1987.05,491.79 2013.09,465.75 C5.1
  Bottom Layer w7.87: P1.7 1400,186.45 1524.63,311.08 1524.63,411.56 1606.7,493.63 1872.28,493.63 v1(1939.18,426.73) 1939.18,163.91 1950,153.08 v1(2180.57,153.08)
BOOT0: R3.2 R4.1 U3.31 | length 324.2
  Top Layer w7.87: U3.31 2856.41,556.41 2866.57,556.41 2926.97,616.8 2926.97,641.1 2933.86,647.99 R3.2 2935.67,647.99 2942.56,641.1 2942.56,631.39 2950.72,623.22 2985.89,623.22 3010.65,647.99 R4.1
DA_PD: U3.22 U9.9 | length 2776.3
  Top Layer w5: v1(1488.54,747.49) 1519.68,778.63 U9.9
  Top Layer w7.87: U3.22 3156.13,386.95 3227.61,458.42 v1(3268.92,458.42)
  Layer 2 w7.87: v1(1488.54,747.49) 1873.84,1132.78 2972.28,1132.78 3038.94,1066.13 3038.94,928.29 3017.13,906.49 3017.13,768.65 3117.17,668.61 3184.99,668.61 3283.58,570.02 3283.58,505.76 3273.05,495.23 3273.05,462.56 v1(3268.92,458.42) v1@3265.91,458.42
GLED: R1.2 U3.26 | length 658
  Top Layer w7.87: v1(2900,1050) R1.2 ; v1(3010.91,586.48) 3012.4,584.98 3012.4,507.19 U3.26
  Bottom Layer w7.87: v1(2900,1050) 2900,697.38 v1(3010.91,586.48)
GND: C1.2 C2.2 C3.2 C4.2 C5.2 C6.2 C8.2 C9.2 C10.2 C11.2 C12.2 C13.2 C14.2 C15.2 C16.2 C18.1 C19.2 C22.2 C23.2 C26.1 C29.2 C32.2 C33.1 C34.1 J1.2 J2.2 J3.2 LED1.1 LED2.1 P1.1 P1.13 P1.14 P1.15 P1.16 R4.2 SW1.2 U1.6 U2.2 U3.16 U3.32 U4.6 U5.2 U6.1 U6.3 U6.4 U6.5 U6.6 U6.8 U6.9 U7.4 U7.5 U7.6 U7.7 U7.8 U7.17 U8.3 U8.5 U8.8 U8.10 U8.11 U8.12 U8.14 U8.17 U8.19 U8.20 U8.21 U8.22 U8.24 U8.25 U8.26 U8.28 U8.29 U8.30 U8.31 U8.32 U9.2 U9.11 U9.14 U10.1 U10.3 U10.4 U10.5 U10.6 U10.8 U10.9 U11.4 U11.5 U11.6 U11.7 U11.8 U11.17 XMER1.1 XMER1.2 | length 8838.8
  Top Layer w5: U1.6 2188.79,510.63 2230.92,468.5 2228.16,465.75 C5.2 ; 2050,683.33 2066.21,699.54 v1(2108.16,699.54) 2114.68,693.02 2114.68,667.04 2261.01,520.72 2267.66,520.72 C11.2 ; C16.2 2067.5,377.63 2060.84,377.63 2052.5,369.29 2052.5,161.97 2103.6,110.87 v1(2273.02,110.87) 2301.42,139.27 2321.32,139.27 ; C13.2 2216.45,385.45 C14.2 2278.79,323.12 2285.44,323.12 2294.07,314.49 2294.07,236.17 ; U4.6 2242.12,240.16 2245.46,243.5 2286.74,243.5 2294.07,236.17 ; C1.2 2378.78,208.33 2441.48,208.33 U2.2 ; C12.2 2395.32,631.49 2395.32,638.14 2403.67,646.49 2506.81,646.49 v1(2510.89,642.41) ; C2.2 2481.04,224.39 2464.98,208.33 2458.13,208.33 U2.2 ; v1(2565.75,318.73) 2574.36,327.34 2597.66,327.34 C9.2 ; v1@3043.89,784.78 v1(3056.07,784.78) ; v1(3139.79,968.21) 3200.71,968.21 3270,1037.5 J3.2@3300,1037.5 ; v1(3144.7,838.61) 3193.89,838.61 3270,762.5 J3.2@3300,762.5 ; LED2.1 LED2.1@3296.69,1244.64 ; 2294.07,236.17 2294.07,205.35 2285.72,197 2279.07,197 C15.2 2321.32,139.27 ; 2321.32,139.27 2470.73,139.27 2478.05,146.59 2478.05,178.6 2470.73,185.93 2468.8,185.93 2454.72,200 U2.2
  Top Layer w7.87: J2.2@100,362.5 J2.2@104.6,357.9 ; J2.2@100,637.5 J2.2@123.15,660.65 ; J1.2@100,962.5 J1.2@115.81,946.69 ; J1.2@100,1237.5 J1.2@101.47,1236.03 ; SW1.2 P1.16 ; v1(487.19,595.5) v1@489.18,593.5 ; v1(499.92,389.94) v1@507.98,398 ; v1(506.36,1024.42) v1@515.92,1024.42 ; v1(514.24,1219.85) v1@522.3,1211.79 ; U10.3@578.5,487 U10.3 ; U6.3@578.5,1087 U6.3 ; U6.1@578.5,1139 U6.1 ; U10.1@581.56,535.94 627.56,535.94 647.5,516 U10.9@650.21,518.71 ; U6.4 598.65,1061 U6.4@601.71,1057.94 ; P1.15 600,457.94 596.94,461 U10.4 U10.3 ; U6.9 647.5,1151.75 ; U6.5@698.64,1059.64 U6.5 U6.6 ; U10.6 U10.9@660.5,487 ; C29.2 945.14,684.25 C26.1 831.52,684.25 815.77,700 754.61,700 719.56,664.95 719.56,542.06 716.5,539 U10.8 696.94,535.94 667.44,535.94 U10.9@650.21,518.71 ; v1@1001.03,1016.78 v1(1001.03,1018.38) ; 1053.12,1070.47 U7.4 1111.2,1070.47 1111.41,1070.26 1111.41,1061.15 1118.33,1054.23 1127.44,1054.23 1127.65,1054.02 U7.5 U7.6 1157.18,1042.82 ; U11.17 1147.34,490.16 U11.6 ; U7.17 1157.18,1042.82 ; U11.8 U11.7 U11.6 ; U7.8@1186.92,1043.61 1186.71,1043.39 U7.8 U7.7 1157.18,1042.82 ; C32.2 1512.44,983.16 1521.12,983.16 ; U9.11 U9.11@1571.32,815.75 ; v1@1629.59,951.29 v1(1630.88,951.29) ; v1(1637.46,748.25) v1@1637.46,749.61 ; C6.2 1718.5,469.18 1739.07,448.62 v1(1739.07,437.69) ; XMER1.1 XMER1.2 2007.5,845.28 1978.56,816.34 1978.56,754.77 2050,683.33 C4.2 ; 2230.92,468.5 C11.2 2275.4,490.72 2328.28,437.83 2371.32,437.83 2379.49,446 2379.49,479.2 2371.32,487.36 2367.36,487.36 2354.72,500 U5.2 ; v1(2343.26,932.24) 2346.84,928.65 2490.8,928.65 U8.3 2548.81,925.59 U8.30 U8.29 ; U8.5 2548.82,874.41 U8.29 ; U8.8 2523.23,823.23 U8.29 ; U8.28 2523.23,976.77 2550,950 2553.96,950 2574.41,970.45 U8.26 U8.25 U8.24 2625.59,951.19 U8.32 ; v1@2538.41,1082.45 v1(2538.41,1093.85) ; U8.14 2676.77,823.23 U8.31 ; U8.22 2676.77,976.77 U8.32 ; U8.17 2651.19,874.41 U8.31 ; v1(2792.78,963.27) 2781.38,963.27 2767.88,976.77 U8.21 U8.20 U8.19 2651.19,925.59 U8.32 ; U3.32 2824.91,551.81 2850,576.89 2850,594.64 2875.9,620.54 v1(2875.9,620.8) 2850.94,645.76 2836.28,645.76 C8.2 ; C33.1 2924.43,850 2959.45,814.99 2959.45,806.3 C34.1 ; U3.16 U3.16@3045.93,174.24 ; v1@3150,99.6 v1(3150.51,99.09) ; LED2.1 LED1.1 ; U10.3 634.5,487 U10.9 ; U10.9 650.21,502.71 U10.9@650.21,518.71 ; U10.9 U10.9@660.5,487 ; U10.9@660.5,487 660.63,486.87 660.63,478.74 667.06,472.31 672.19,472.31 683.5,461 U10.5 764.78,461 783.82,441.96 959.02,441.96 979.02,421.95 1039.78,421.95 1088.31,470.47 U11.4 1111.2,470.47 1111.41,470.26 1111.41,461.15 1118.33,454.23 1127.44,454.23 1127.65,454.02 U11.5 U11.6 ; U8.29 2574.41,848.82 U8.10 U8.11 U8.12 2625.59,848.81 U8.31 ; U8.31 U8.32
  Layer 1 w5: v1(2343.26,932.24) v1@2345.58,932.24 ; v1(2565.75,318.73) v1@2565.75,330.91 ; v1(3139.79,968.21) v1@3142.24,965.76 ; v1@3142.24,841.06 v1(3144.7,838.61) ; 3288.08,1116.51 3288.08,1152.16 v1(3296.69,1160.77)
  Layer 1 w7.87: v1(231.72,660.65) v1@234.44,663.38 ; v1(233.33,357.9) v1@241.46,357.9 ; v1@234.44,943.97 v1(237.17,946.69) v1@236.84,947.02 ; v1@236.84,1235.7 v1(236.51,1236.03) v1@247.91,1236.03 ; v1@479.06,595.5 v1(487.19,595.5) ; v1(499.92,389.94) v1@499.96,389.9 ; P1.16 P1.16 P1.15 P1.14 P1.13 ; v1(506.36,1024.42) v1@510.3,1028.36 ; v1@510.3,1215.91 v1(514.24,1219.85) v1@525.64,1219.85 ; v1(601.71,966.89) v1@603.68,968.86 ; v1@696.67,968.86 v1(698.64,970.83) ; v1@962.09,1318.55 v1(964.13,1320.6) ; v1(1001.03,1018.38) v1@1006.32,1018.38 ; v1@1089.31,935.39 v1(1094.6,935.39) v1@1096.63,933.36 ; v1@1222.75,933.36 v1(1224.78,931.32) v1@1226.6,933.15 ; v1(1302.08,1043.61) v1@1305.09,1043.61 ; P1.1 P1.1@2010.87,110.87 ; v1(2875.9,620.8) v1@2884,620.8 ; v1@3047.97,784.78 v1(3056.07,784.78)
  Bottom Layer w5: v1(3056.07,784.78) 3275.22,784.78 J3.2@3300,760 ; v1(3296.69,1160.77) 3296.69,1038.31 J3.2@3300,1035
  Bottom Layer w7.87: J2.2@100,365 J2.2@107.1,357.9 ; J2.2@100,640 J2.2@120.65,660.65 ; J1.2@100,965 J1.2@118.31,946.69 ; J1.2@100,1240 J1.2@103.97,1236.03
  other v1: 660.63,363.29 847.54,394.43 1363.44,452.62 1355.52,568.34 650.21,632.47 1532.3,1068.13 796.35,1177.3 678.15,1234.82
NetC4_1: C4.1 U1.7 | length 94.4
  Top Layer w7.87: U1.7 1979.77,531.16 1998.58,531.16 2021.14,553.72 2021.14,555.39 C4.1
NetC6_1: C6.1 C7.1 U1.3 | length 201.3
  Top Layer w7.87: C6.1 1800,500 C7.1 1834.04,481.5 1863.17,510.63 U1.3
NetC7_2: C7.2 U1.4 | length 117
  Top Layer w7.87: C7.2 1850.09,450 1891.03,490.94 U1.4
NetC14_1: C14.1 U4.7 | length 98
  Top Layer w5: U4.7 2231.54,259.84 C14.1
NetC16_1: C16.1 C17.1 U4.3 | length 258.7
  Top Layer w5: C16.1 2075.24,247.8 2087.82,235.22 ; U4.3 2109.26,238.88 2091.48,238.88 2087.82,235.22 ; C17.1 2103.22,149.39 2096.57,149.39 2084.16,161.8 2084.16,231.56 2087.82,235.22
NetC17_2: C17.2 U4.4 | length 58.4
  Top Layer w5: C17.2@2103.22,165.42 C17.2 2110.96,220.05 U4.4
NetC20_1: C20.1 J1.1 | length 200
  Top Layer w6.8: J1.1 C20.1
NetC20_2: C20.2 U6.2 | length 268.9
  Top Layer w6.8: C20.2 451.92,1100 464.92,1113 U6.2
NetC21_1: C21.1 L1.1 U6.7 | length 427.7
  Top Layer w6.8: U6.7 887,1113 C21.1
  Top Layer w7.87: U6.7 703.06,1109.94 727.27,1109.94 800,1037.21 L1.1
NetC21_2: C21.2 U7.2 | length 172.6
  Top Layer w6.8: C21.2 1008.19,1100 1018.03,1109.84 U7.2
NetC24_1: C24.1 XMER1.3 | length 177
  Top Layer w6.8: XMER1.3 2195.28,795.28 C24.1
NetC24_2: C24.2 U8.4 | length 303.8
  Top Layer w6.8: C24.2 2314.6,800 2414.6,900 U8.4
NetC25_1: C25.1 U7.11 | length 189.7
  Top Layer w6.8: U7.11 1390.16,1109.84 C25.1
NetC25_2: C25.2 U9.5 | length 376.8
  Top Layer w6.8: C25.2 1424.66,1093.16 1424.66,1090.2 1423.64,1089.18 1423.64,1084.21 1415.79,1076.36 1407.86,1076.36 1355.56,1024.06 1355.56,894.44 1394.3,855.7 1473.83,855.7 U9.5
NetC27_1: C27.1 U11.11 | length 189.7
  Top Layer w6.8: U11.11 1390.16,509.84 C27.1
NetC27_2: C27.2 U9.6 | length 360.9
  Top Layer w6.8: C27.2 1449.2,517.7 1449.2,823.34 1460.71,834.85 1473.83,834.85 U9.6
NetC28_1: C28.1 U8.18 | length 293.9
  Top Layer w6.8: U8.18 C28.1
NetC28_2: C28.2 J3.1 | length 268.5
  Top Layer w6.8: C28.2 J3.1
NetC30_1: C30.1 J2.1 | length 200
  Top Layer w6.8: J2.1 C30.1
NetC30_2: C30.2 U10.2 | length 268.9
  Top Layer w6.8: C30.2 451.92,500 464.92,513 U10.2
NetC31_1: C31.1 L2.1 U10.7 | length 401.7
  Top Layer w6.8: U10.7 887,513 C31.1
  Top Layer w7.87: U10.7 703.06,516.06 727.27,516.06 800,588.79 L2.1
NetC31_2: C31.2 U11.2 | length 172.6
  Top Layer w6.8: C31.2 1008.19,500 1018.03,509.84 U11.2
NetLED1_2: LED1.2 R1.1 | length 392.1
  Top Layer w7.87: R1.1 2900,1150.98 3099.02,1350 LED1.2
NetLED2_2: LED2.2 R2.1 | length 250.7
  Top Layer w7.87: R2.1 3000,1150.98 3006.89,1157.87 3007.87,1157.87 3100,1250 LED2.2
NetR6_1: R6.1 U7.12 | length 185.2
  Top Layer w7.87: U7.12 1214.36,1263.38 1250,1299.02 R6.1
NetR7_1: R7.1 U7.13 | length 148.3
  Top Layer w7.87: U7.13 1186.71,1285.72 1200,1299.02 R7.1
NetR8_1: R8.1 U7.14 | length 149.9
  Top Layer w7.87: R8.1 1150,1200 1167.02,1182.98 U7.14
NetR9_2: R9.2 U8.2 | length 200.2
  Top Layer w7.87: R9.2 2338.15,1056.11 2443.08,951.18 U8.2
NetR10_1: R10.1 U7.15 | length 173.8
  Top Layer w7.87: R10.1 1100,1204.61 1104.61,1200 1124.11,1200 1147.13,1176.99 1147.13,1157.39 U7.15
NetR11_1: R11.1 U7.16 | length 202.2
  Top Layer w7.87: R11.1 1050,1200 1080.91,1169.09 1127.44,1169.09 1127.65,1168.87 U7.16
NetR12_1: R12.1 U9.13 | length 153.6
  Top Layer w6.8: U9.13 1654.13,855.12 1699.02,900 R12.1
NetR12_2: R12.2 XMER1.6 | length 168.5
  Top Layer w6.8: R12.2 1895.28,900 XMER1.6
NetR13_1: R13.1 U9.12 | length 149.7
  Top Layer w6.8: U9.12 1663.58,835.43 1699.02,800 R13.1
NetR13_2: R13.2 XMER1.4 | length 168.5
  Top Layer w6.8: R13.2 1895.28,800 XMER1.4
NetR14_1: R14.1 U11.12 | length 151.8
  Top Layer w7.87: U11.12 1214.36,629.91 1250,665.55 R14.1
NetR15_1: R15.1 U11.13 | length 114.9
  Top Layer w7.87: U11.13 1186.71,652.26 1200,665.55 R15.1
NetR16_1: R16.1 U11.14 | length 116.4
  Top Layer w7.87: R16.1 1150,600 1167.02,582.98 U11.14
NetR17_1: R17.1 U11.15 | length 140.4
  Top Layer w7.87: R17.1 1100,604.61 1104.61,600 1124.11,600 1147.13,576.99 1147.13,557.39 U11.15
NetR18_1: R18.1 U11.16 | length 168.8
  Top Layer w7.87: R18.1 1050,600 1080.91,569.09 1127.44,569.09 1127.65,568.87 U11.16
NetU8_9: U8.9 U8.13 | length 133.9
  Top Layer w6.8: U8.9 2552.42,790.26 2552.42,779.9 2561.86,770.46 2638.14,770.46 2647.58,779.9 2647.58,790.26 U8.13
NetU8_23: U8.23 U8.27 | length 135.2
  Top Layer w6.8: U8.27@2551.88,1009.2 2551.88,1020.32 2561.64,1030.08 2638.36,1030.08 2648.12,1020.32 U8.23@2648.12,1009.2
  Top Layer w7.87: U8.27 U8.27@2551.88,1009.2 ; U8.23@2648.12,1009.2 U8.23
NRST: P1.10 R5.2 SW1.1 U3.4 | length 3740.3
  Top Layer w5: SW1.1 150,100 v1(300,250) ; P1.10 1100,217.57 1164.53,282.09 1185.61,282.09 v1(1258.75,355.23) ; R5.2@2649.32,417.58 R5.2 ; U3.4 2792.15,355.45 2865.71,281.89 v1(2868.59,281.89)
  Top Layer w7.87: R5.2 2673.77,417.58 2733.84,357.51 2767.09,357.51 U3.4
  Layer 2 w5: v1(1258.75,355.23) 1258.75,259.82 1331.85,186.71 1868.9,186.71 2115.13,432.94 2458.08,432.94 2504.15,386.87 2504.15,327.3 2550.22,281.23 2613.39,281.23 2639.66,307.49 2735.23,307.49 2760.83,281.89 v1(2868.59,281.89)
  Bottom Layer w5: v1(300,250) 1000,250 1100,150 P1.10 P1.10@1103.59,103.59
RLED: R2.2 U3.25 | length 656.8
  Top Layer w7.87: v1(3000,1050) R2.2 ; U3.25 3045.39,553.88 v1(3078.23,586.73)
  Bottom Layer w7.87: v1(3000,1050) 3000,664.97 v1(3078.23,586.73)
SWCLK: P1.11 U3.24 | length 2851.5
  Top Layer w5: P1.11 1000,178.79 1198.4,377.19 v1(1198.4,381.03) ; U3.24 3139.32,449.94 v1(3226.28,536.9)
  Layer 2 w5: v1(1198.4,381.03) 1231.32,413.95 1274.41,413.95 1310.46,377.9 1310.46,363.4 1375.82,298.04 1874.16,298.04 2024.06,447.94 2755.58,447.94 2889.45,314.06 3036.26,314.06 3226.28,504.08 v1(3226.28,536.9)
SWDIO: P1.12 U3.23 | length 3454.9
  Top Layer w5: P1.12 1075.66,275.66 1075.66,346.57 1022.65,399.58 v1(923.53,399.58) ; U3.23 3078.15,418.44 3059.65,436.94 3059.65,461.12 3166.7,568.17 3166.7,589.74 v1(3175.32,598.35)
  Layer 2 w5: v1(923.53,399.58) 971.5,447.54 1291.1,447.54 1336.09,402.55 1336.09,400.48 1336.09,399.14 ccw(c1368.25,379.86) 1387.54,347.7 1388.87,347.7 1390.94,347.7 1424.13,314.51 1425.6,313.04 1772.45,313.04 1976.91,517.5 2799.14,517.5 2987.58,329.06 3030.05,329.06 3098.38,397.39 3098.38,521.41 v1(3175.32,598.35)
UART_RX: P1.9 U3.30 | length 2377.4
  Top Layer w5: P1.9 1200,211.61 v1(1368.25,379.86) ; U3.30 2887.91,482.7 2927.45,443.16 2927.45,431.36 2983.63,375.17 3005.91,375.17 v1(3014.52,366.56)
  Layer 2 w5: v1(1368.25,379.86) 1368.77,379.34 1400.75,379.34 1452.04,328.04 1483.86,328.04 1713.41,328.04 1920.37,535 2820.68,535 2966.83,388.85 2992.23,388.85 v1(3014.52,366.56)
UART_TX: P1.8 U3.29 | length 2126.4
  Top Layer w5: P1.8 1451.02,251.02 v1(1451.02,382.1) ; U3.29 2919.4,482.7 2969.29,432.81 v1(2979.03,432.81)
  Layer 2 w5: v1(1451.02,382.1) 1490.08,343.04 1707.2,343.04 1914.16,550 2861.84,550 v1(2979.03,432.81)
V1L: R6.2 U3.15 | length 2536.4
  Top Layer w7.87: R6.2 1254.08,1337.55 v1(1308.63,1337.55) ; U3.15 3013.89,133.05 v1(3063.95,82.99)
  Bottom Layer w7.87: v1(1308.63,1337.55) 1712.45,1337.55 2350,700 2424.09,700 2441.96,682.13 2529.95,682.13 2562.07,650 2600,650 2800,450 2850,450 3063.95,236.05 v1(3063.95,82.99)
V1R: R14.2 U3.6 | length 1707
  Top Layer w7.87: R14.2 1250.47,699.53 v1(1328.68,699.53) ; v1(2655.19,269.99) 2662.32,269.99 2684.78,292.46 U3.6
  Bottom Layer w7.87: v1(1328.68,699.53) 1329.15,700 2050,700 2480.01,269.99 v1(2655.19,269.99)
V2L: R7.2 U3.14 | length 2606.7
  Top Layer w7.87: R7.2 1200,1334.45 1260.02,1394.47 v1(1261.82,1394.47) ; U3.14 2982.39,110.49 3000.2,92.68 v1(3000.2,81.28)
  Bottom Layer w7.87: v1(1261.82,1394.47) 1261.82,1329.3 1292.51,1298.61 1701.39,1298.61 2400,600 2600,600 2800,400 2850,400 3000.2,249.8 v1(3000.2,81.28)
V2R: R15.2 U3.7 | length 1892.8
  Top Layer w7.87: R15.2 1200,700.98 1253.13,754.12 1277.39,754.12 v1(1285.45,762.18) ; v1(2656.62,205.35) 2712.23,260.96 U3.7
  Bottom Layer w7.87: v1(1285.45,762.18) 1285.45,687.7 1323.15,650 2050,650 2494.65,205.35 v1(2656.62,205.35)
V3L: R8.2 U3.13 | length 2605.1
  Top Layer w7.87: R8.2 1150,1334.45 1183.37,1367.82 1183.37,1384.72 v1(1191.43,1392.79) ; 2950.9,103.43 U3.13
  Bottom Layer w7.87: v1(1191.43,1392.79) 1242.3,1341.92 1242.3,1323.54 1315.84,1250 1700,1250 2400,550 2600,550 2800,350 2874.72,350 2982.32,242.4 2982.32,123.46 v1(2939.01,80.15)
V3R: R16.2 U3.8 | length 1985
  Top Layer w7.87: R16.2 1150,700.98 1216.95,767.93 v1(1216.95,776.47) ; v1(2666.06,143) 2666.06,149.37 2746.15,229.47 U3.8
  Bottom Layer w7.87: v1(1216.95,776.47) 1216.95,730.92 1315.75,632.13 2017.87,632.13 2507,143 v1(2666.06,143)
V4L: R10.2 U3.12 | length 2554.3
  Top Layer w7.87: R10.2 1100,1334.45 1113.45,1347.89 v1(1113.45,1392.83) ; v1(2876.69,79.29) 2919.4,122.01 U3.12
  Bottom Layer w7.87: v1(1113.45,1392.83) 1306.28,1200 1700,1200 2400,500 2566.71,500 2598.84,467.87 2607.4,467.87 2831.95,243.33 2831.95,234.76 2876.69,190.03 v1(2876.69,79.29)
V4R: R17.2 U3.9 | length 2109.5
  Top Layer w7.87: R17.2 1100,700.98 1144.53,745.52 1144.53,778.78 v1(1148.07,782.33) ; v1(2685.22,84.66) 2774.27,173.7 U3.9
  Bottom Layer w7.87: v1(1148.07,782.33) 1199.07,731.33 1199.07,723.52 1308.34,614.25 1488.11,614.25 1552.36,550 2050,550 2515.34,84.66 v1(2685.22,84.66)
V5L: R11.2 U3.11 | length 2612.3
  Top Layer w7.87: v1(1025.7,1388.42) 1025.7,1377.02 1045.63,1357.09 1045.63,1337.83 R11.2 ; v1(2814.08,80.43) 2817.85,80.43 2876.35,138.93 2876.35,139.14 2887.91,150.7 U3.11
  Bottom Layer w7.87: v1(1025.7,1388.42) 1264.12,1150 1716.3,1150 2416.3,450 2600,450 2814.08,235.92 v1(2814.08,80.43)
V5R: R18.2 U3.10 | length 2248.1
  Top Layer w7.87: R18.2 1050,751.41 1071.14,772.56 v1(1071.14,782.33) ; v1(2750.61,79.58) 2790.4,119.37 2825.29,119.37 2844.85,138.93 2844.85,139.14 2856.41,150.7 U3.10
  Bottom Layer w7.87: v1(1071.14,782.33) 1326.97,526.5 2023.5,526.5 2504.28,45.72 2716.76,45.72 v1(2750.61,79.58)
VA: U3.21 U8.6 | length 1278.8
  Top Layer w7.87: v1(2406.52,818.27) 2437.07,848.82 U8.6 ; U3.21 3193.2,355.45 v1(3220.29,382.54)
  Bottom Layer w7.87: v1(2406.52,818.27) 2474.78,750 2600,750 2802.46,547.54 3147.85,547.54 3200,495.39 3200,414.23 3220.29,393.94 v1(3220.29,382.54)
VB: U3.20 U8.7 | length 1270.3
  Top Layer w7.87: v1(2405.34,744.02) 2450.3,788.97 2456.6,788.97 2490.86,823.23 U8.7 ; U3.20 3103.21,321.89 3214.95,321.89 v1(3219.5,317.35)
  Bottom Layer w7.87: v1(2405.34,744.02) 2449.37,700 2600,700 2800,500 3100,500 3155.6,444.4 3155.6,381.24 v1(3219.5,317.35)
pads on no net: U2.4 U3.2 U3.3 U3.18 U3.19 U3.27 U3.28 U5.4 U7.3 U7.9 U7.10 U9.4 U9.7 U11.3 U11.9 U11.10 XMER1.5

## Polygon pours and split planes (outlines as drawn)
GND on Layer 2 "GND_poly_2" (solid, pour order 7): 0,0 0,1450 3400,1450 3400,0
GND on Layer 1 "GND_poly_1" (solid, pour order 6): 0,0 0,1450 3400,1450 3400,0
GND on Top Layer "GND_poly_top" (solid, pour order 5): 0,0 0,1450 3400,1450 3400,0
GND on Bottom Layer "GND_poly_bot" (solid, pour order 8): 0,0 0,1450 3400,1450 3400,0

## Silkscreen, mask and mechanical layers (free items; w line width, h text height)
Top Overlay:
  text "GND" at 540,160 h60 r90
  text "GND" at 640,160 h60 r90
  text "GND" at 740,160 h60 r90
  text "GND" at 840,160 h60 r90
  text "DIO" at 940,160 h60 r90
  text "CLK" at 1040,160 h60 r90
  text "NRST" at 1140,160 h60 r90
  text "RX" at 1240,160 h60 r90
  text "TX" at 1340,160 h60 r90
  text "-5V" at 1440,160 h60 r90
  text "+5V" at 1540,160 h60 r90
  text "-3V3" at 1640,160 h60 r90
  text "+3V3" at 1740,160 h60 r90
  text "-2V5" at 1840,160 h60 r90
  text "+2V5" at 1940,160 h60 r90
  text "GND" at 2040,160 h60 r90

## Text inside footprints (layer, text, board x,y; h text height)
P1: Top Overlay "16" at 387.01,77.56 h40
U3: Top Overlay "*" at 2702.65,455.69 h50; Mechanical 13 "*" at 2796.15,440.69 h50
U7: Top Overlay "*" at 1046.66,1114.37 h50; Mechanical 13 "*" at 1103.34,1114.37 h50
U8: Top Overlay "*" at 2446.36,951.77 h50; Mechanical 13 "*" at 2516.36,951.77 h50
U11: Top Overlay "*" at 1046.66,514.37 h50; Mechanical 13 "*" at 1103.34,514.37 h50
XMER1: Top Overlay "*" at 2105,920.28 h50 r180; Mechanical 13 "*" at 2105,920.28 h50 r180; Bottom Overlay "*" at 2105,920.28 h50 r180